# EAGLE board KeyboardController (EAGLE 7.7.0)

Size 99.5 x 100 mm. Coordinates in mm from the lower left corner, seen from the top.
Copper layers (1*16): Top 0.035mm / dielectric 1.5mm / Bottom 0.035mm
Design rules "default": minimum track width 10mil, minimum drill 24mil, track to track 8mil, track to pad 8mil, pad to pad 8mil, via to via 8mil, smd to smd 8mil, copper to edge 40mil, drill to drill 8mil, minimum pad ring 10mil, minimum via ring 8mil, stop-mask expansion 4mil, vias tented up to drill 0mil, thermal gap 10mil

## Footprints (pad centres in the part's own frame; a part is rotated, then mirrored left to right if it is on the bottom)
USB-B-PTH-VERTICAL = drill 0.914 pad 1.676: D+ 4.826,4.394; D- 4.826,7.595; GND 7.315,4.394; VBUS 7.315,7.595 | drill 2.286: P$1 0,4.902; P$2 12.04,4.902
2X10 = drill 1.016 pad 1.88 octagon: 1 -11.43,-1.27; 2 -11.43,1.27; 3 -8.89,-1.27; 4 -8.89,1.27; 5 -6.35,-1.27; 6 -6.35,1.27; 7 -3.81,-1.27; 8 -3.81,1.27; 9 -1.27,-1.27; 10 -1.27,1.27; 11 1.27,-1.27; 12 1.27,1.27; 13 3.81,-1.27; 14 3.81,1.27; 15 6.35,-1.27; 16 6.35,1.27; 17 8.89,-1.27; 18 8.89,1.27; 19 11.43,-1.27; 20 11.43,1.27
2X8 = drill 1.016 pad 1.88 octagon: 1 0,0; 2 0,2.54; 3 2.54,0; 4 2.54,2.54; 5 5.08,0; 6 5.08,2.54; 7 7.62,0; 8 7.62,2.54; 9 10.16,0; 10 10.16,2.54; 11 12.7,0; 12 12.7,2.54; 13 15.24,0; 14 15.24,2.54; 15 17.78,0; 16 17.78,2.54
TEENSY_3.0-3.2&LC_ALL_PINS = drill 0.965: 0 -7.62,13.97; 1 -7.62,11.43; 2 -7.62,8.89; 3 -7.62,6.35; 3.3V 7.62,11.43; 3.3V1 -2.54,-16.51; 4 -7.62,3.81; 5 -7.62,1.27; 6 -7.62,-1.27; 7 -7.62,-3.81; 8 -7.62,-6.35; 9 -7.62,-8.89; 10 -7.62,-11.43; 11 -7.62,-13.97; 12 -7.62,-16.51; 13 7.62,-16.51; 14/A0 7.62,-13.97; 15/A1 7.62,-11.43; 16/A2 7.62,-8.89; 17/A3 7.62,-6.35; 18/A4 7.62,-3.81; 19/A5 7.62,-1.27; 20/A6 7.62,1.27; 21/A7 7.62,3.81; 22/A8 7.62,6.35; 23/A9 7.62,8.89; A10 5.08,6.35; A11 5.08,3.81; AGND 7.62,13.97; AREF 5.08,8.89; GND -7.62,16.51; GND1 0,-16.51; PGM 2.54,-16.51; RESET/DAC 5.08,-16.51; VBAT -5.08,-16.51; VIN 7.62,16.51; VUSB 5.08,13.97
3.5MM-JACK-SWITCH-13MM-OUTPUT = drill 0.8 pad 1.93 long: RING@3 -3.7,0; SECOND@3 0,-3.5; SWITCH@3 3.7,0; TIP@3 0,4.5
POWER_16_SHROUDED = drill 1.016 pad 1.88 square: 1 -8.89,-1.27 | drill 1.016 pad 1.88: 2 -8.89,1.27; 3 -6.35,-1.27; 4 -6.35,1.27; 5 -3.81,-1.27; 6 -3.81,1.27; 7 -1.27,-1.27; 8 -1.27,1.27; 9 1.27,-1.27; 10 1.27,1.27; 11 3.81,-1.27; 12 3.81,1.27; 13 6.35,-1.27; 14 6.35,1.27; 15 8.89,-1.27; 16 8.89,1.27
PB6149L = drill 1: 1 2.54,2.54; 2 2.54,-2.54; 3 -2.54,2.54; 4 -2.54,-2.54; LEDNEG 0,-2.7; LEDPOS 0,2.7 | hole 1: 2.54,0
OG-POTS_ALPS_POT_VERTICAL = drill 1 pad 1.88: P$1 -2.58,-6.7; P$2 0,-6.7; P$3 2.58,-6.7 | drill 2.2 pad 3.175: P$4 4.4,0; P$5 -4.4,0

## Placement (x,y rotation side)
JP1  USBPTH-VERTICAL  [USB-B-PTH-VERTICAL]  9.82,4.62 0 top
U$1  EURORACK_PCB20HP_10X10CM  [EURORACK20HP_10X10CM]  -0.34,-3 0 top
U$2  M10X2  [2X10]  35.22,45.26 90 top
U$3  M08X2  [2X8]  36.49,8.43 90 top
U$4  TEENSY_3.1-3.2_ALL_PINS  [TEENSY_3.0-3.2&LC_ALL_PINS]  25.06,79.55 0 top
U$5  PJ-341  [3.5MM-JACK-SWITCH-13MM-OUTPUT]  6.01,36.37 0 top
U$6  PJ-341  [3.5MM-JACK-SWITCH-13MM-OUTPUT]  6.01,24.94 0 top
U$7  PJ-341  [3.5MM-JACK-SWITCH-13MM-OUTPUT]  6.01,47.8 0 top
U$8  PJ-341  [3.5MM-JACK-SWITCH-13MM-OUTPUT]  6.01,59.23 0 top
U$9  PJ-341  [3.5MM-JACK-SWITCH-13MM-OUTPUT]  6.01,70.66 0 top
U$10  PJ-341  [3.5MM-JACK-SWITCH-13MM-OUTPUT]  6.01,82.09 0 top
U$11  PJ-341  [3.5MM-JACK-SWITCH-13MM-OUTPUT]  6.01,93.52 0 top
U$12  POWERSHROUDED  [POWER_16_SHROUDED]  -24.47,16.05 90 top  (outside the outline)
U$13  SWITCH_W_LED_PB6149L-X-102YELLOW  [PB6149L]  -46.06,-72.85 0 top  (outside the outline)
U$14  SWITCH_W_LED_PB6149L-X-102YELLOW  [PB6149L]  -66.38,-72.85 0 top  (outside the outline)
U$15  [OG-POTS_ALPS_POT_VERTICAL]  -54.95,-99.52 0 top  (outside the outline)

## Library data of the parts
JP1 U$2 U$3 = SparkFun-Connectors
U$1 U$12 = EurorackModularParts
U$4 = Teensy_3_and_LC_Series_Boards_v1.4
U$5 = EurorackModularParts; DESC: Gate; MPN: PJ-341
U$6 = EurorackModularParts; DESC: Trigger; MPN: PJ-341
U$7 = EurorackModularParts; DESC: CV; MPN: PJ-341
U$8 = EurorackModularParts; DESC: Reset; MPN: PJ-341
U$9 = EurorackModularParts; DESC: Clock; MPN: PJ-341
U$10 U$11 = EurorackModularParts; DESC: Output; MPN: PJ-341
U$13 U$14 = zephod-components
U$15 = EurorackModularParts; DESC: Parameter

## Nets
3.3V: U$3.5 U$4.3.3V U$4.3.3V1
AGND: U$4.AGND
AREF: U$4.AREF
BRK1: U$2.3
BRK2: U$2.7
BRK3: U$2.11
BRK4: U$2.15
BRK5: U$2.19
BRK6: U$2.18
CV_IN: U$3.1
CV_OUT: U$3.7
GATE_IN: U$3.2
GATE_OUT: U$3.8
GND: U$3.6 U$3.11 U$4.GND U$4.GND1 U$12.3 U$12.4 U$12.5 U$12.6 U$12.7 U$12.8
MK1: U$2.1
MK2: U$2.5
MK3: U$2.9
MK4: U$2.13
MK5: U$2.17
MK6: U$2.20
N$2: U$4.VUSB
N$7: U$3.13
N$8: U$3.15
N$14: U$3.12
N$15: U$3.14
N$16: U$3.16
PEDAL_RIM: U$3.10
PEDAL_TIP: U$3.9
RX: U$3.3
SINK1: U$2.2
SINK2: U$2.4
SINK3: U$2.6
SINK4: U$2.8
SINK5: U$2.10
SINK6: U$2.12
SINK7: U$2.14
SINK8: U$2.16
TX: U$3.4
VBAT: U$4.VBAT
VIN: U$4.VIN

## Tracks (layer width: path | path; a pad name or v marks a point on that pad's centre or on a via)
3.3V  (2 unrouted)
GND  (9 unrouted)